# Altium PCB pay-optical.PcbDoc (part 3 of 6)
Units mm, origin at the board's own origin, x right, y up, seen from the top; angles counter-clockwise.
Board outline 128 x 54 mm, 4 copper layers (Top Layer, GND, VCC, Bottom Layer), stack 0.778 mm thick; 459 components, 246 nets, 1364 pads, 496 vias.
Unrouted connection lines stored in the file: 133.
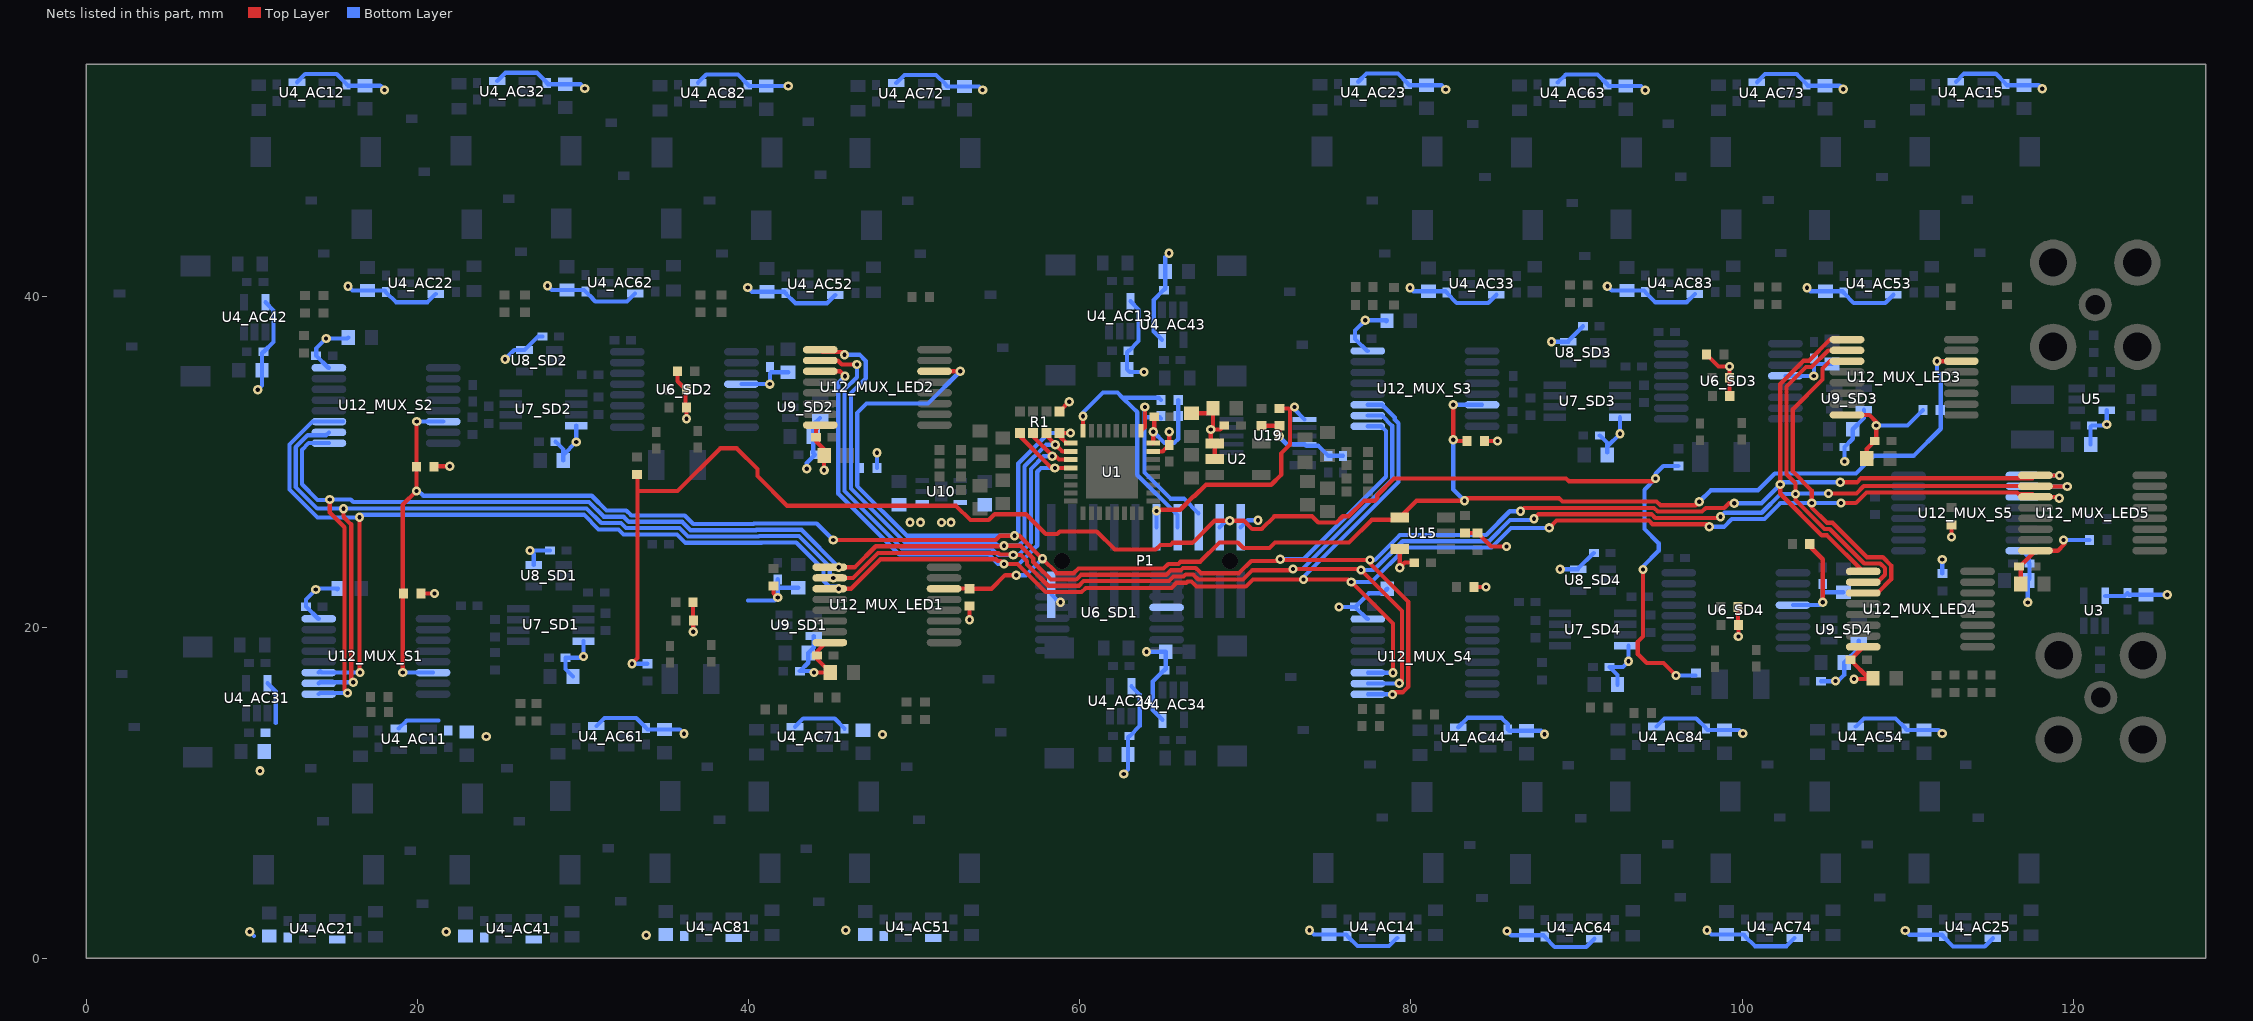
[diagram p4: the nets of this part, all layers, seen from the top]

## Via types
v1: diameter 0.559, hole 0.254, Top Layer to Bottom Layer, 440 vias
v2: diameter 2.362, hole 2.1, Top Layer to Bottom Layer, 34 vias
v3: diameter 1.3, hole 1, Top Layer to Bottom Layer, 14 vias
v4: diameter 6, hole 3.6, Top Layer to Bottom Layer, 8 vias

## Nets (pads, with @x,y where several pads share a name; then routed paths per layer and width w, separated by ;. In a path a pad name is that pad's centre, name@x,y a point inside that pad or via, vN(x,y) a via of type N, cw(c..) or ccw(c..) an arc to the next point about the centre after c; other vN are vias at no path point) (continued)
E\N\: R1.4 R27_MUX_LED1.1 R27_MUX_LED2.1 R27_MUX_LED3.1 R27_MUX_S1.1 R27_MUX_S2.1 R27_MUX_S3.1 U1.1 U12_MUX_LED1.6 U12_MUX_LED2.6 U12_MUX_LED3.6 U12_MUX_S1.6 U12_MUX_S2.6 U12_MUX_S3.6 U15.4 | length 172.2
  Top Layer w0.254: v1(19.112,17.261) 19.112,27.393 v1(19.952,28.232) R27_MUX_S2.1@19.952,29.693 19.952,32.409 v1(19.959,32.416) ; v1(45.11,25.273) 54.927,25.273 55.181,25.527 v1(56.058,25.527) 56.351,25.527 v1@57.752,24.127 ; U12_MUX_LED2.6@51.232,35.457 v1(52.78,35.457) ; U12_MUX_LED1.6@51.807,22.325 53.344,22.344 R27_MUX_LED1.1@53.37,22.344 ; R27_MUX_LED1.1@53.345,22.326 54.678,22.326 55.495,23.143 v1(56.163,23.143) ; v1(57.752,24.141) v1@57.752,24.127 ; U1.1@59.193,31.115 59.193,31.119 58.782,31.53 R1.4@58.782,31.735 v1(59.446,31.735) ; v1(82.556,33.432) v1(82.556,31.319) 82.633,31.242 R27_MUX_S3.1@83.393,31.242 ; v1(97.414,27.575) 97.202,27.363 95.067,27.363 94.83,27.6 89.15,27.6 89.131,27.619 89.118,27.619 88.949,27.788 83.388,27.788 v1(83.236,27.635) 80.331,27.635 U15.4@79.321,26.625 79.187,26.491 77.637,26.491 76.267,25.121 71.793,25.121 71.459,24.787 69.874,24.787 69.543,25.118 68.437,25.118 67.272,23.952 66.08,23.952 65.954,23.826 65.346,23.826 65.066,23.546 59.919,23.546 59.636,23.263 58.615,23.263 v1@57.752,24.127 ; v1(111.763,36.067) U12_MUX_LED3.6@113.233,36.067
  Bottom Layer w0.254: v1(19.112,17.261) U12_MUX_S1.6@20.946,17.261 ; v1(19.952,28.232) 20.066,28.232 20.358,27.94 30.528,27.94 31.417,27.051 32.614,27.051 32.919,26.746 36.149,26.746 36.657,26.238 40.298,26.238 40.324,26.264 44.12,26.264 v1(45.11,25.273) ; v1(19.959,32.416) U12_MUX_S2.6@21.555,32.416 ; v1(52.78,35.457) 50.825,33.503 47.117,33.503 46.558,32.944 46.558,28.539 49.57,25.527 v1(56.058,25.527) ; v1(56.163,23.143) 56.754,23.143 v1(57.752,24.141) ; v1@56.286,25.648 56.286,29.896 58.126,31.735 v1(59.446,31.735) ; v1(82.556,31.319) 82.556,28.315 v1(83.236,27.635) ; v1(82.556,33.432) U12_MUX_S3.6@84.293,33.432 ; v1(97.414,27.575) 98.109,28.27 100.953,28.27 101.966,29.283 106.883,29.283 107.95,30.35 110.36,30.35 111.995,31.985 111.995,35.24 111.763,35.473 v1(111.763,36.067)